# Altium PCB GILBERT.PcbDoc
Units mil, origin at the board's own origin, x right, y up, seen from the top; angles counter-clockwise.
Board outline 8140 x 4665 mil, 2 copper layers (Top Layer, Bottom Layer), stack 61.811 mil thick; 36 components, 27 nets, 111 pads, 10 vias.
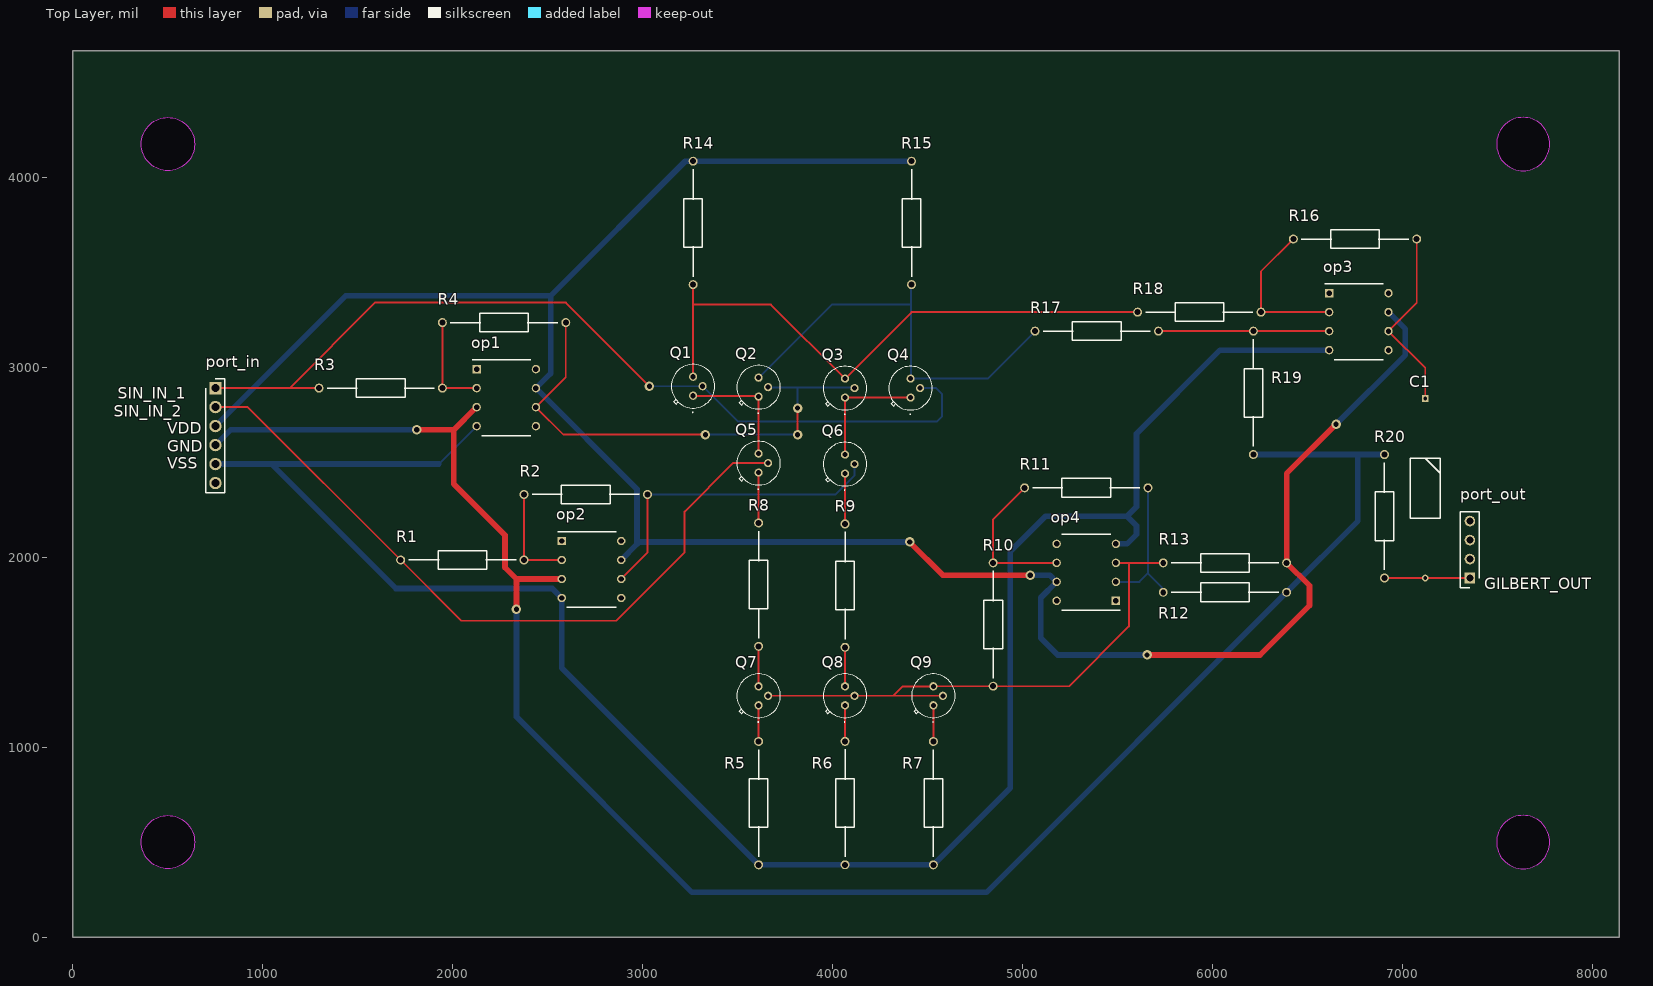
[diagram p0: Top Layer view]
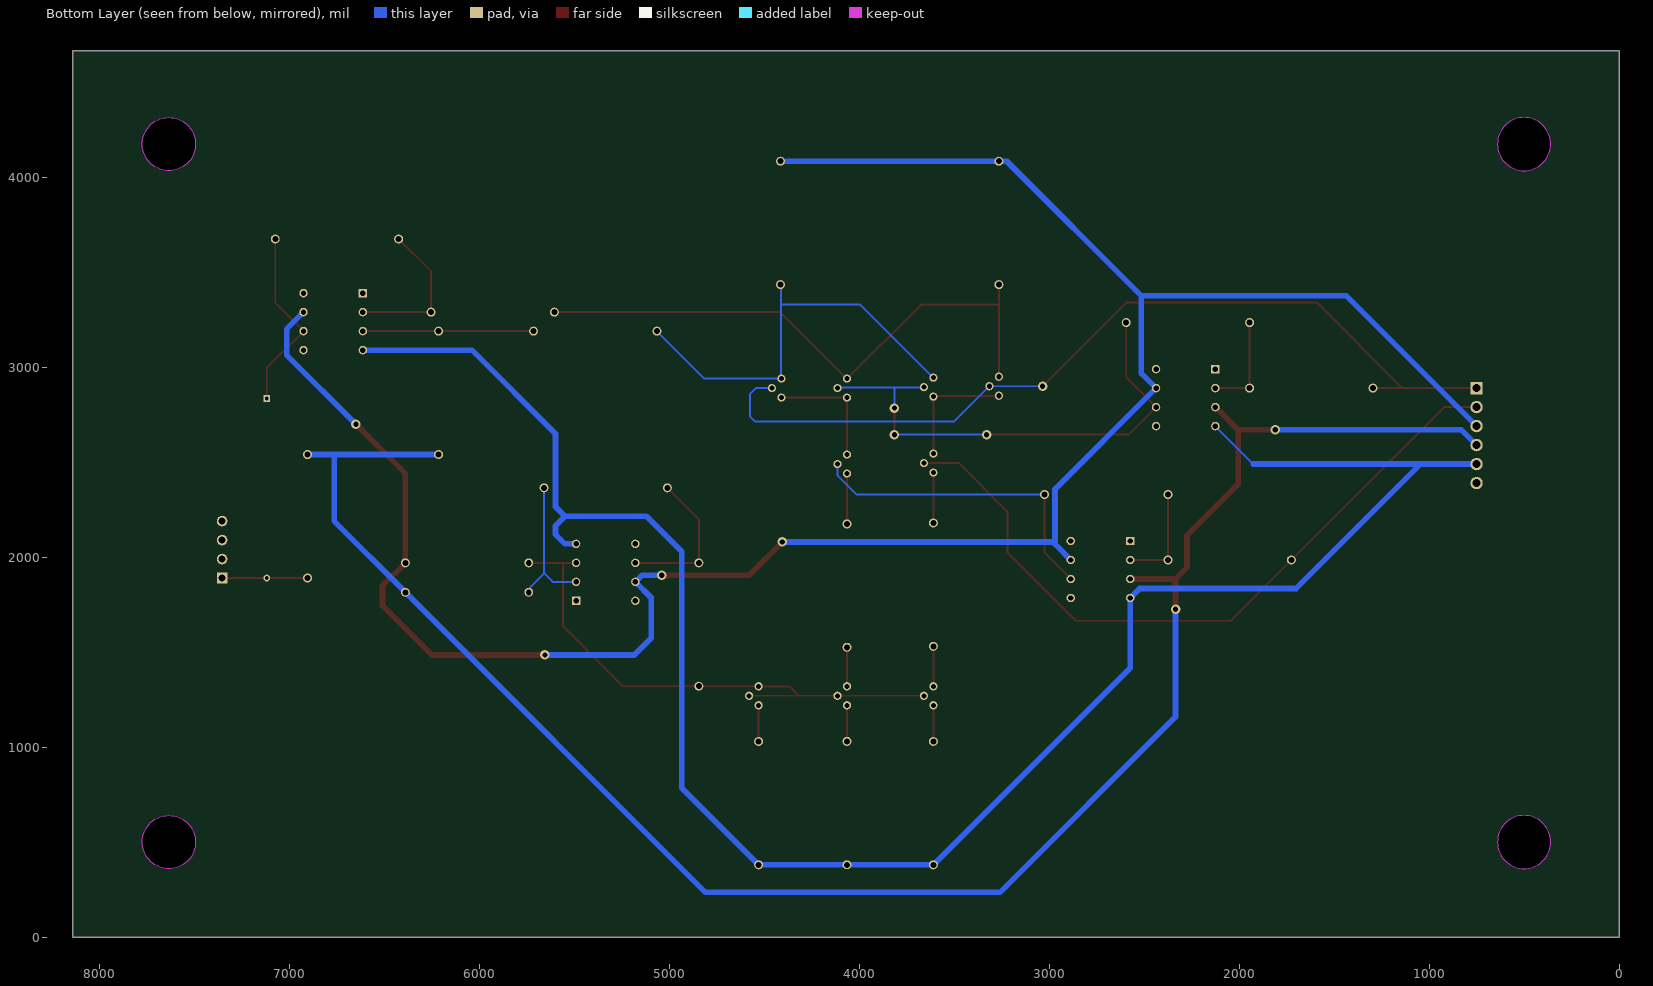
[diagram p1: Bottom Layer view, seen from below]
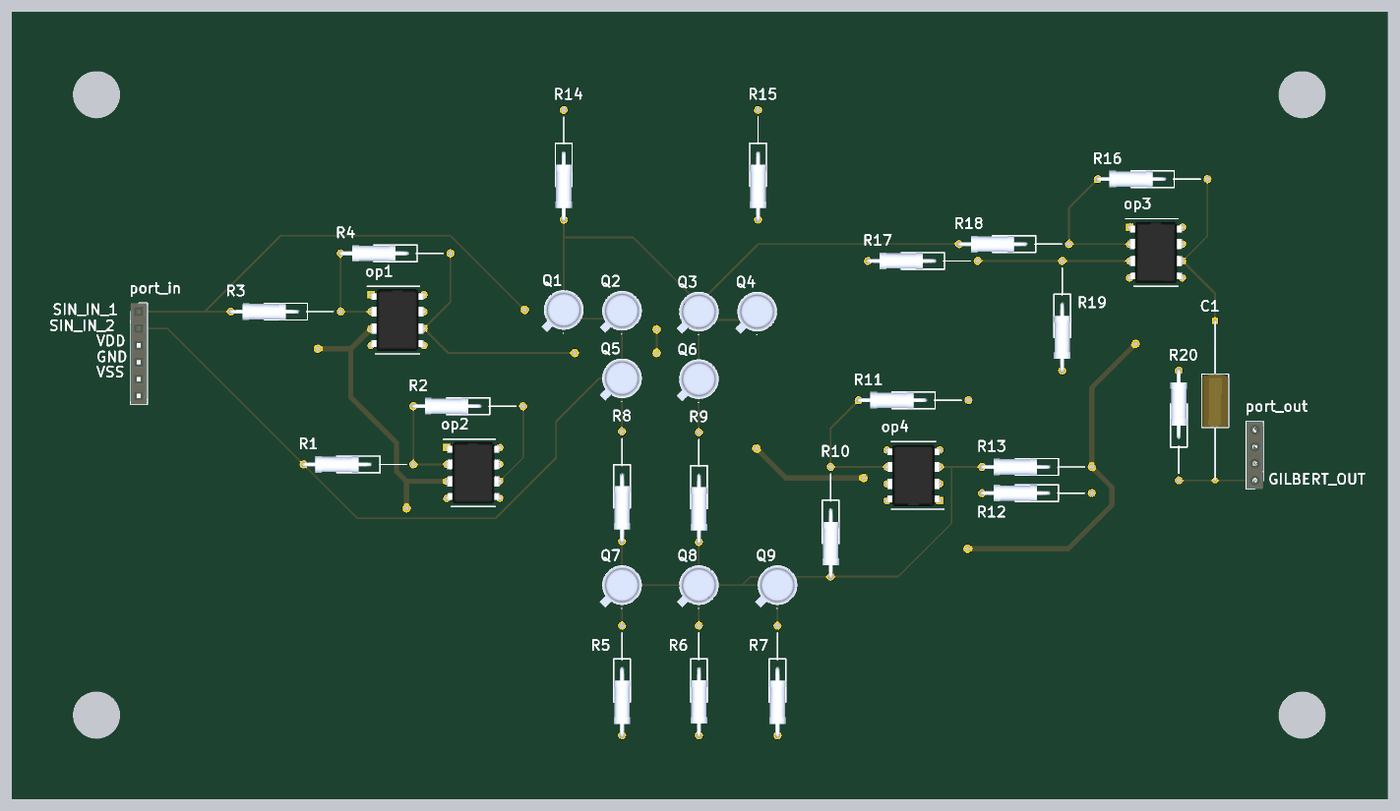
[diagram p2: 3D render of the assembled board from above, using the file's embedded part models]

## Layer stack, top to bottom
Top Solder: solder mask 0.5, Solder Resist, Dk 3.5
Top Layer: signal copper 1.378
Dielectric 1: dielectric 59.055, FR-4, Dk 4.5
Bottom Layer: signal copper 1.378
Bottom Solder: solder mask 0.5, Solder Resist, Dk 3.5

## Board outline
0,0 0,4665 8140,4665 8140,0
cut-out: 7495,4175 ccw(c7635,4175) 7635,4035 ccw(c7635,4175) 7775,4175 ccw(c7635,4175) 7635,4315 ccw(c7635,4175)
cut-out: 7495,500 ccw(c7635,500) 7635,360 ccw(c7635,500) 7775,500 ccw(c7635,500) 7635,640 ccw(c7635,500)
cut-out: 500,360 cw(c500,500) 360,500 cw(c500,500) 500,640 cw(c500,500) 640,500 cw(c500,500)
cut-out: 500,4035 cw(c500,4175) 360,4175 cw(c500,4175) 500,4315 cw(c500,4175) 640,4175 cw(c500,4175)

## Design rules (kind name [scope] priority, off if disabled: settings)
Clearance [All] p1: gap=10 ignorepadtopadclearanceinfootprint=FALSE
PolygonConnect [All] p1: connectstyle=Relief reliefconductorwidth=10 reliefentries=4 polygonreliefangle="90 Angle" airgapwidth=10
RoutingVias [All] p1: holewidth=28 width=50 viastyle="Through Hole" minholewidth=28 minwidth=50 maxholewidth=28 maxwidth=50
SolderMaskExpansion [All] p1: expansion=4 istentingtop=FALSE
SupplyNets "Schematic Supply Nets_2" [InNet('VSS')] p1: voltage=0.000
SupplyNets "Schematic Supply Nets_1" [InNet('GND')] p2: voltage=0.000
SupplyNets "Schematic Supply Nets" [InNet('VDD')] p3: voltage=0.000
Width [All] p1: maxlimit=30 minlimit=10 preferedwidth=10 minimp=50.000000 maximp=50.000000 favimp=50.000000
30 further rules are at their usual default settings.

## Components (designator, comment, footprint, x,y, rotation, side; value= is the part's Value field where it differs from the comment)
C1 "0113207" CAPPA2400W30L800D400 7120,2835 r270 top
op1 "LF411ACN_NOPB" DIP794W53P254L959H508Q8N 2281.3,2840 r0 top
op2 "LF411ACN_NOPB" DIP794W53P254L959H508Q8N 2730,1935 r0 top
op3 "LF411ACN_NOPB" DIP794W53P254L959H508Q8N 6770,3240 r0 top
op4 "LF411ACN_NOPB" DIP794W53P254L959H508Q8N 5335,1920 r180 top
port_in "929870-01-06-RA" RHDR6W64P0X254_1X6_1524X254X380P 750,2890 r270 top
port_out "929870-01-04-RA" RHDR4W76P0X254_1X4_1016X254X826P 7355,1890 r90 top
Q1 "2N2222A" CENTRAL_TO18 3265,2900 r90 top
Q2 "2N2222A" CENTRAL_TO18 3610,2895 r90 top
Q3 "2N2222A" CENTRAL_TO18 4065,2890 r90 top
Q4 "2N2222A" CENTRAL_TO18 4410,2890 r90 top
Q5 "2N2222A" CENTRAL_TO18 3610,2495 r90 top
Q6 "2N2222A" CENTRAL_TO18 4065,2490 r90 top
Q7 "2N2222A" CENTRAL_TO18 3610,1270 r90 top
Q8 "2N2222A" CENTRAL_TO18 4065,1270 r90 top
Q9 "2N2222A" CENTRAL_TO18 4530,1270 r90 top
R1 "10k" RESAD1650W60L650D250 1725.39,1985 r0 top
R2 "10k" RESAD1650W60L650D250 2375,2330 r0 top
R3 "10k" RESAD1650W60L650D250 1295.39,2890 r0 top
R4 "10k" RESAD1650W60L650D250 1945,3235 r0 top
R5 "8k" RESAD1650W60L650D250 3610,380 r90 top
R6 "8k" RESAD1650W60L650D250 4065,380.39 r90 top
R7 "4k" RESAD1650W60L650D250 4530,380 r90 top
R8 "25k" RESAD1650W60L650D250 3610,1530.39 r90 top
R9 "25k" RESAD1650W60L650D250 4065,1525.39 r90 top
R10 "100k" RESAD1650W60L650D250 4845,1320.39 r90 top
R11 "100k" RESAD1650W60L650D250 5010.39,2365 r0 top
R12 "100k" RESAD1650W60L650D250 5740.39,1815 r0 top
R13 "100k" RESAD1650W60L650D250 5740.39,1970 r0 top
R14 "25k" RESAD1650W60L650D250 3265,3435 r90 top
R15 "25k" RESAD1650W60L650D250 4415,3435 r90 top
R16 "100k" RESAD1650W60L650D250 6425.39,3675 r0 top
R17 "100k" RESAD1650W60L650D250 5065.39,3190 r0 top
R18 "100k" RESAD1650W60L650D250 5605.39,3290 r0 top
R19 "100k" RESAD1650W60L650D250 6215,2540.39 r90 top
R20 "MRS25000C1003FC100" RESAD1650W60L650D250 6905,2540 r270 top

## Footprints (in the part's own frame and the unit in brackets; to place one, negate y for a bottom-side part, rotate by r counter-clockwise, add the part's x,y. Pads: shape width x height; smd on the part's side, far side on the other; paste and mask are expansions set on the pad)
CAPPA2400W30L800D400 [mm]
  rect 0.9x0.9 hole 0.5: 1(0,0)
  round 0.9 hole 0.5: 2(24,0)
  silkscreen extent 8,-2 16,2, body extent -0.15,-2 24.15,2, height 3.99
CENTRAL_TO18 [mm]
  round 1.1 hole 0.68: 1(-1.27,0) 2(0,-1.27) 3(1.27,0)
  silkscreen extent -3.53,-2.92 2.92,2.92, body extent -3.34,-2.92 2.91,3.34, height 5.33
DIP794W53P254L959H508Q8N [mm]
  rect 1.13x1.13 hole 0.73: 1(-3.97,3.81)
  round 1.13 hole 0.73: 2(-3.97,1.27) 3(-3.97,-1.27) 4(-3.97,-3.81) 5(3.97,-3.81) 6(3.97,-1.27) 7(3.97,1.27) 8(3.97,3.81)
  silkscreen extent -4.53,-5.08 3.3,5.08, body extent -4.1,-4.64 4.1,4.64, height 4.21
RESAD1650W60L650D250 [mm]
  round 1.2 hole 0.8: 1(0,0) 2(16.5,0)
  silkscreen extent 1.08,-1.25 15.42,1.25, body extent -0.3,-1.25 10.3,1.25, height 2.55
RHDR4W76P0X254_1X4_1016X254X826P [mm]
  rect 1.425x1.425 hole 0.95: 1(0,0)
  round 1.425 hole 0.95: 2(2.54,0) 3(5.08,0) 4(7.62,0)
  silkscreen extent -1.27,-1.27 8.89,1.27, body extent -1.27,-1.27 8.89,1.27, height 8.26
RHDR6W64P0X254_1X6_1524X254X380P [mm]
  rect 1.65x1.65 hole 1.1: 1(0,0)
  round 1.65 hole 1.1: 2(2.54,0) 3(5.08,0) 4(7.62,0) 5(10.16,0) 6(12.7,0)
  silkscreen extent -1.27,-1.27 13.97,1.27, body extent -1.27,-1.27 13.97,1.27, height 3.8

## Part data
C1: "Capacitor", Manufacturer_Name="RS Pro", Datasheet Link=https://docs.rs-online.com/d68c/0900766b8157e121.pdf, Manufacturer_Part_Number=0113207
op1 op2 op3 op4: "Integrated Circuit", Arrow Part Number=LF411ACN/NOPB, Manufacturer_Name="Texas Instruments", Mouser Part Number=926-LF411ACN/NOPB, Arrow Price/Stock=https://www.arrow.com/en/products/lf411acnnopb/texas-instruments, Datasheet Link=https://www.allaboutcircuits.com/electronic-components/datasheet/LF411ACN%2FNOPB--Texas-Instruments/, Height=5.08mm, Manufacturer_Part_Number=LF411ACN/NOPB, Mouser Price/Stock=https://www.mouser.co.uk/ProductDetail/Texas-Instruments/LF411ACN-NOPB?qs=X1J7HmVL2ZHTi9IUrVme4Q%3D%3D
port_in: "Connector", Manufacturer_Name=3M, Mouser Part Number=517-929870-01-06-RA, Arrow Part Number=929870-01-06-RA, Arrow Price/Stock=https://www.arrow.com/en/products/929870-01-06-ra/3m?region=nac, Datasheet Link=https://componentsearchengine.com/Datasheets/1/929870-01-06-RA.pdf, Height=3.8mm, Manufacturer_Part_Number=929870-01-06-RA, Mouser Price/Stock=https://www.mouser.co.uk/ProductDetail/3M-Electronic-Solutions-Division/929870-01-06-RA?qs=neFkstNq%252B6F6Q7pF8hOFFA%3D%3D
port_out: "Connector", Manufacturer_Name=3M, Mouser Part Number=517-929870-01-04-RA, Arrow Part Number=929870-01-04-RA, Arrow Price/Stock=https://www.arrow.com/en/products/929870-01-04-ra/3m, Datasheet Link=https://componentsearchengine.com/Datasheets/2/929870-01-04-RA.pdf, Height=8.26mm, Manufacturer_Part_Number=929870-01-04-RA, Mouser Price/Stock=https://www.mouser.co.uk/ProductDetail/3M-Electronic-Solutions-Division/929870-01-04-RA?qs=neFkstNq%252B6GPZEKactAgTg%3D%3D
Q1 Q2 Q3 Q4 Q5 Q6 Q7 Q8 Q9: "Transistor BJT NPN", Manufacturer_Name="Central Semiconductor", Mouser Part Number=610-2N2222A, Arrow Part Number=2N2222A, Arrow Price/Stock=https://www.arrow.com/en/products/2n2222a/central-semiconductor?utm_currency=USD&region=nac, Datasheet Link=https://my.centralsemi.com/get_document.php?cmp=1&mergetype=pd&mergepath=pd&pdf_id=2N2221A.PDF, Manufacturer_Part_Number=2N2222A, Mouser Price/Stock=https://www.mouser.com/Search/Refine.aspx?Keyword=610-2N2222A
R1 R2 R3 R4 R5 R6 R7 R8 R9 R10 R11 R12 R13 R14 R15 R16 R17 R18 R19: library part MRS25000C1003FC100, "Resistor", Manufacturer_Name=Vishay, Mouser Part Number=594-MRS25000C1003FC1, Arrow Part Number=MRS25000C1003FC100, Arrow Price/Stock=https://www.arrow.com/en/products/mrs25000c1003fc100/vishay?region=nac, Datasheet Link=http://www.vishay.com/docs/28724/mrs16m25.pdf, Manufacturer_Part_Number=MRS25000C1003FC100, Mouser Price/Stock=https://www.mouser.co.uk/ProductDetail/Vishay-BC-Components/MRS25000C1003FC100?qs=H30XFsNYD%2FHyk6mBpuomxg%3D%3D
R20: "Resistor", Manufacturer_Name=Vishay, Mouser Part Number=594-MRS25000C1003FC1, Arrow Part Number=MRS25000C1003FC100, Arrow Price/Stock=https://www.arrow.com/en/products/mrs25000c1003fc100/vishay?region=nac, Datasheet Link=http://www.vishay.com/docs/28724/mrs16m25.pdf, Manufacturer_Part_Number=MRS25000C1003FC100, Mouser Price/Stock=https://www.mouser.co.uk/ProductDetail/Vishay-BC-Components/MRS25000C1003FC100?qs=H30XFsNYD%2FHyk6mBpuomxg%3D%3D

## Via types
v1: diameter 50, hole 28, Top Layer to Bottom Layer, 10 vias

## Nets (pads, with @x,y where several pads share a name; then routed paths per layer and width w, separated by ;. In a path a pad name is that pad's centre, name@x,y a point inside that pad or via, vN(x,y) a via of type N, cw(c..) or ccw(c..) an arc to the next point about the centre after c; other vN are vias at no path point)
GND: op1.3 op2.3 port_in.4 R12.2 R19.1 R20.1 | length 10006.5
  Top Layer w30: v1(1810,2670) 2005,2670 ; op1.3 2005,2670 ; v1(2335,1725) 2335,1885 ; op2.3 2335,1885 ; 2005,2670 2005,2385 2275,2115 2275,1945 2335,1885
  Bottom Layer w10: R19.1 R19.1@6215.2,2540.2 ; R20.1@6904.8,2540.2 R20.1
  Bottom Layer w30: port_in.4 830,2670 v1(1810,2670) ; v1(2335,1725) 2335,1160 3260,235 4810,235 R12.2 6765,2190 6765,2540.2 ; R19.1@6215.2,2540.2 6765,2540.2 ; R20.1@6904.8,2540.2 6765,2540.2
NetC1_1: C1.1 op3.6 R16.2 | length 981.8
  Top Layer w10: R16.2 7075,3338.7 op3.6 7120,2996.3 C1.1
NetC1_2: C1.2 port_out.1 R20.2 | length 450.2
  Top Layer w10: R20.2 6905.14,1890.26 7119.86,1890.26 C1.2 7354.88,1890.12 port_out.1
Netop1_2: op1.2 R3.2 R4.1 | length 525
  Top Layer w10: R4.1 R3.2 op1.2
Netop1_6: op1.6 Q2.2 Q3.2 R4.2 | length 2652.1
  Top Layer w10: R4.2 2594.61,2947.01 op1.6 2582.6,2645 v1(3330,2645) ; v1(3815,2645) v1(3815,2785)
  Bottom Layer w10: v1(3330,2645) v1(3815,2645) ; Q2.2 3662.5,2892.5 3815,2892.5 ; v1(3815,2785) 3815,2892.5 ; Q3.2 4112.5,2892.5 3815,2892.5
Netop2_2: op2.2 R1.2 R2.1 | length 543.7
  Top Layer w10: R2.1 R1.2 op2.2
Netop2_6: op2.6 Q6.2 R2.2 | length 1694.1
  Top Layer w10: op2.6 3024.61,2023.31 R2.2
  Bottom Layer w10: R2.2 4015,2330 4115,2430 Q6.2
Netop3_2: op3.2 R16.1 R18.2 | length 814.3
  Top Layer w10: R16.1 6255,3504.61 R18.2 op3.2
Netop3_3: op3.3 R17.2 R19.2 | length 898.7
  Top Layer w10: R17.2 R19.2 op3.3
Netop4_2: op4.2 R11.2 R12.1 | length 770.6
  Bottom Layer w10: op4.2 5615,1870 5660,1915 ; R11.2 5660,1915 ; R12.1 5733.27,1822.13 5733.27,1841.73 5660,1915
Netop4_3: op4.3 Q7.2 Q8.2 Q9.2 Q9.3 R10.1 R13.1 | length 2895.3
  Top Layer w10: Q7.2 Q8.2 4320,1270 ; Q9.2 4320,1270 ; op4.3 5560,1970 ; R13.1 5560,1970 ; 4320,1270 4370,1320 Q9.3 4530.2,1320.2 4844.8,1320.2 R10.1 5245.4,1320.39 5560,1634.99 5560,1970
Netop4_6: op4.6 R10.2 R11.1 | length 797.2
  Top Layer w10: R11.1 4845,2199.61 R10.2 op4.6
Netport_in_1: port_in.1 Q1.2 Q4.2 R3.1 | length 4683.5
  Top Layer w10: port_in.1 1140,2890 ; R3.1 1140,2890 ; v1(3035,2900) 2595,3340 1590,3340 1140,2890
  Bottom Layer w10: v1(3035,2900) Q1.2 3500,2715 4550,2715 4575,2740 4575,2860 4545,2890 Q4.2
Netport_in_2: port_in.2 Q5.2 R1.1 | length 3845.4
  Top Layer w10: port_in.2 920.39,2790 R1.1 2045,1665.39 2860.39,1665.39 3220,2025 3220,2240 3475,2495 Q5.2
NetQ1_1: Q1.1 Q2.1 Q5.3 | length 647.1
  Top Layer w10: Q1.1 3267.5,2847.5 3607.5,2847.5 Q2.1 Q5.3
NetQ1_3: Q1.3 Q3.3 R14.1 R18.1 | length 3131.9
  Top Layer w10: Q1.3 3265,3330 ; R14.1 3265,3330 ; R18.1 4415,3290 Q3.3 3675,3330 3265,3330
NetQ2_3: Q2.3 Q4.3 R15.1 R17.1 | length 2221.5
  Top Layer w10: R15.1@4412.5,3432.5 R15.1
  Bottom Layer w10: Q2.3 3995,3330 4412.5,3330 ; R15.1 4412.5,3432.5 4412.5,3330 ; R17.1 4815.39,2940 Q4.3 4412.5,2942.5 4412.5,3330
NetQ3_1: Q3.1 Q4.1 Q6.3 | length 645
  Top Layer w10: Q6.3 Q3.1 Q4.1
NetQ5_1: Q5.1 R8.2 | length 265
  Top Layer w10: R8.2 Q5.1
NetQ6_1: Q6.1 R9.2 | length 265
  Top Layer w10: R9.2 Q6.1
NetQ7_1: Q7.1 R5.2 | length 180
  Top Layer w10: R5.2@3610,1040 Q7.1
NetQ7_3: Q7.3 R8.1 | length 210.4
  Top Layer w10: Q7.3 R8.1
NetQ8_1: Q8.1 R6.2 | length 190
  Top Layer w10: R6.2 Q8.1
NetQ8_3: Q8.3 R9.1 | length 205.4
  Top Layer w10: Q8.3 R9.1
NetQ9_1: Q9.1 R7.2 | length 195
  Top Layer w10: R7.2@4530,1025 Q9.1
VDD: op1.7 op2.7 op3.7 op4.7 port_in.3 R13.2 R14.2 R15.2 | length 11996.2
  Top Layer w30: v1(4405,2080) 4580,1905 v1(5040,1905) ; v1(5655,1485) 6250,1485 6510,1745 6510,1850 R13.2 6390,2440 v1(6650,2700)
  Bottom Layer w30: port_in.3 1435.59,3375.59 2515,3375.59 ; op2.7 2970,2068.7 2970,2080 ; v1(4405,2080) 2970,2080 ; R15.2 R14.2 3224.02,4084.61 2515,3375.59 ; v1(5040,1905) 5143.7,1905 op4.7 5095,1786.3 5095,1575 5185,1485 v1(5655,1485) ; v1(6650,2700) 7015,3065 7015,3201.3 op3.7 ; 2515,3375.59 2515,2967.4 op1.7 2970,2357.6 2970,2080
VSS: op1.4 op2.4 op3.4 op4.4 port_in.5 R5.1 R6.1 R7.1 | length 10439.3
  Bottom Layer w10: 1925,2490 op1.4 ; R5.1 R5.1@3610.2,380.2 ; R6.1@4064.8,380.2 R6.1 R6.1@4065.2,380.2 ; R7.1@4529.8,380.2 R7.1
  Bottom Layer w30: port_in.5 1045,2490 ; 1925,2490 1045,2490 ; R5.1 2573.7,1416.3 op2.4 2523.7,1835 1700,1835 1045,2490 ; R5.1@3610.2,380.2 R6.1@4064.8,380.2 ; R6.1@4065.2,380.2 R7.1@4529.8,380.2 ; R7.1 4935,785 4935,2030 5120,2215 5550,2215 ; op4.4 5550,2070 5600,2120 5600,2165 5550,2215 ; op3.4 6040,3090 5600,2650 5600,2265 5550,2215
pads on no net: op1.1 op1.5 op1.8 op2.1 op2.5 op2.8 op3.1 op3.5 op3.8 op4.1 op4.5 op4.8 port_in.6 port_out.2 port_out.3 port_out.4

## Other copper
Multi-Layer:
  pour cut-out: 500,4035 cw(c500,4175) 360,4175 cw(c500,4175) 500,4315 cw(c500,4175) 640,4175 cw(c500,4175)
  pour cut-out: 500,4035 cw(c500,4175) 360,4175 cw(c500,4175) 500,4315 cw(c500,4175) 640,4175 cw(c500,4175)

## Silkscreen, mask and mechanical layers (free items; w line width, h text height)
Top Overlay:
  text "SIN_IN_1" at 235,2835 h60
  text "SIN_IN_2" at 215,2740 h60
  text "VDD" at 495,2650 h60
  text "GND" at 495,2555 h60
  text "VSS" at 495,2465 h60
  text "GILBERT_OUT" at 7430,1830 h60
Mechanical 1:
  circle w10: c7635,4175 r140
  circle w10: c7635,500 r140
  circle w10: c500,500 r140
  pour cut-out: 500,360 cw(c500,500) 360,500 cw(c500,500) 500,640 cw(c500,500) 640,500 cw(c500,500)
  pour cut-out: 500,360 cw(c500,500) 360,500 cw(c500,500) 500,640 cw(c500,500) 640,500 cw(c500,500)
  lines w10: 0,0 8140,0 8140,4665 0,4665 0,0